# EAGLE board LEDs (EAGLE 9.2.2)

No outline drawn. Coordinates in mm, seen from the top.
Copper layers (1*16): Top 0.035mm / dielectric 1.5mm / Bottom 0.035mm
Design rules "default": minimum track width 6mil, minimum drill 0.35mm, track to track 6mil, track to pad 6mil, pad to pad 6mil, via to via 6mil, smd to smd 6mil, copper to edge 40mil, drill to drill 6mil, minimum pad ring 10mil, minimum via ring 8mil, stop-mask expansion 4mil, vias tented up to drill 0mil, thermal gap 10mil

## Footprints (pad centres in the part's own frame; a part is rotated, then mirrored left to right if it is on the bottom)
LB10 = drill 0.813 long: 1 -11.43,-3.81; 2 -8.89,-3.81; 3 -6.35,-3.81; 4 -3.81,-3.81; 5 -1.27,-3.81; 6 1.27,-3.81; 7 3.81,-3.81; 8 6.35,-3.81; 9 8.89,-3.81; 10 11.43,-3.81; 11 11.43,3.81; 12 8.89,3.81; 13 6.35,3.81; 14 3.81,3.81; 15 1.27,3.81; 16 -1.27,3.81; 17 -3.81,3.81; 18 -6.35,3.81; 19 -8.89,3.81; 20 -11.43,3.81

## Placement (x,y rotation side)
E$1  [LB10]  12.7,5.08 0 top
E$2  [LB10]  12.7,20.32 0 top
E$3  [LB10]  12.7,35.56 0 top
E$4  [LB10]  12.7,50.8 0 top
E$5  [LB10]  12.7,66.04 0 top
E$6  [LB10]  12.7,81.28 0 top
E$7  [LB10]  12.7,96.52 0 top
E$8  [LB10]  -15.24,5.08 0 top
E$9  [LB10]  -15.24,20.32 0 top
E$10  [LB10]  -15.24,35.56 0 top
E$11  [LB10]  -15.24,50.8 0 top
E$12  [LB10]  -15.24,66.04 0 top
E$13  [LB10]  -15.24,81.28 0 top
E$14  [LB10]  -15.24,96.52 0 top

## Library data of the parts
E$1-E$14 = SpectralAnalyzer